# Allegro board 08_042340a.brd
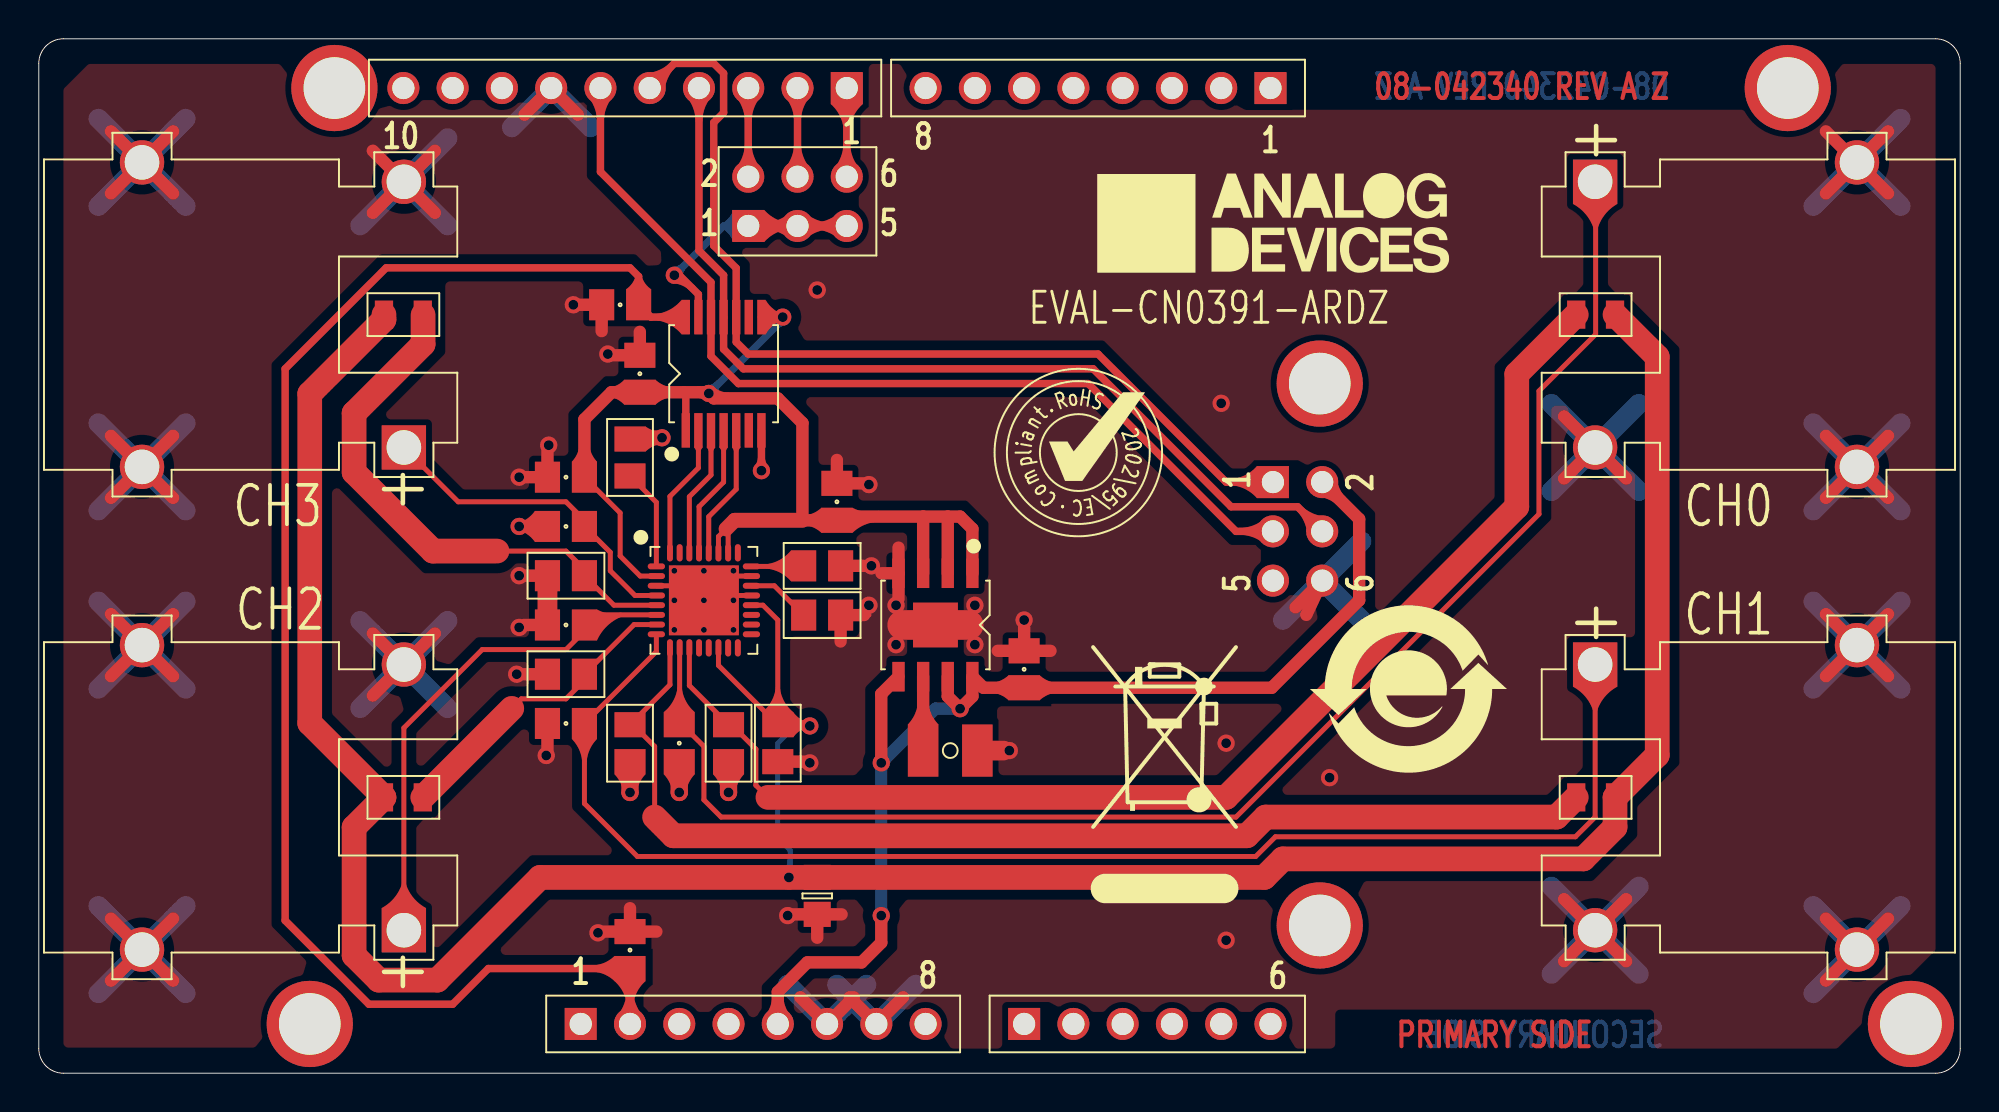
[diagram p0: board, top side]
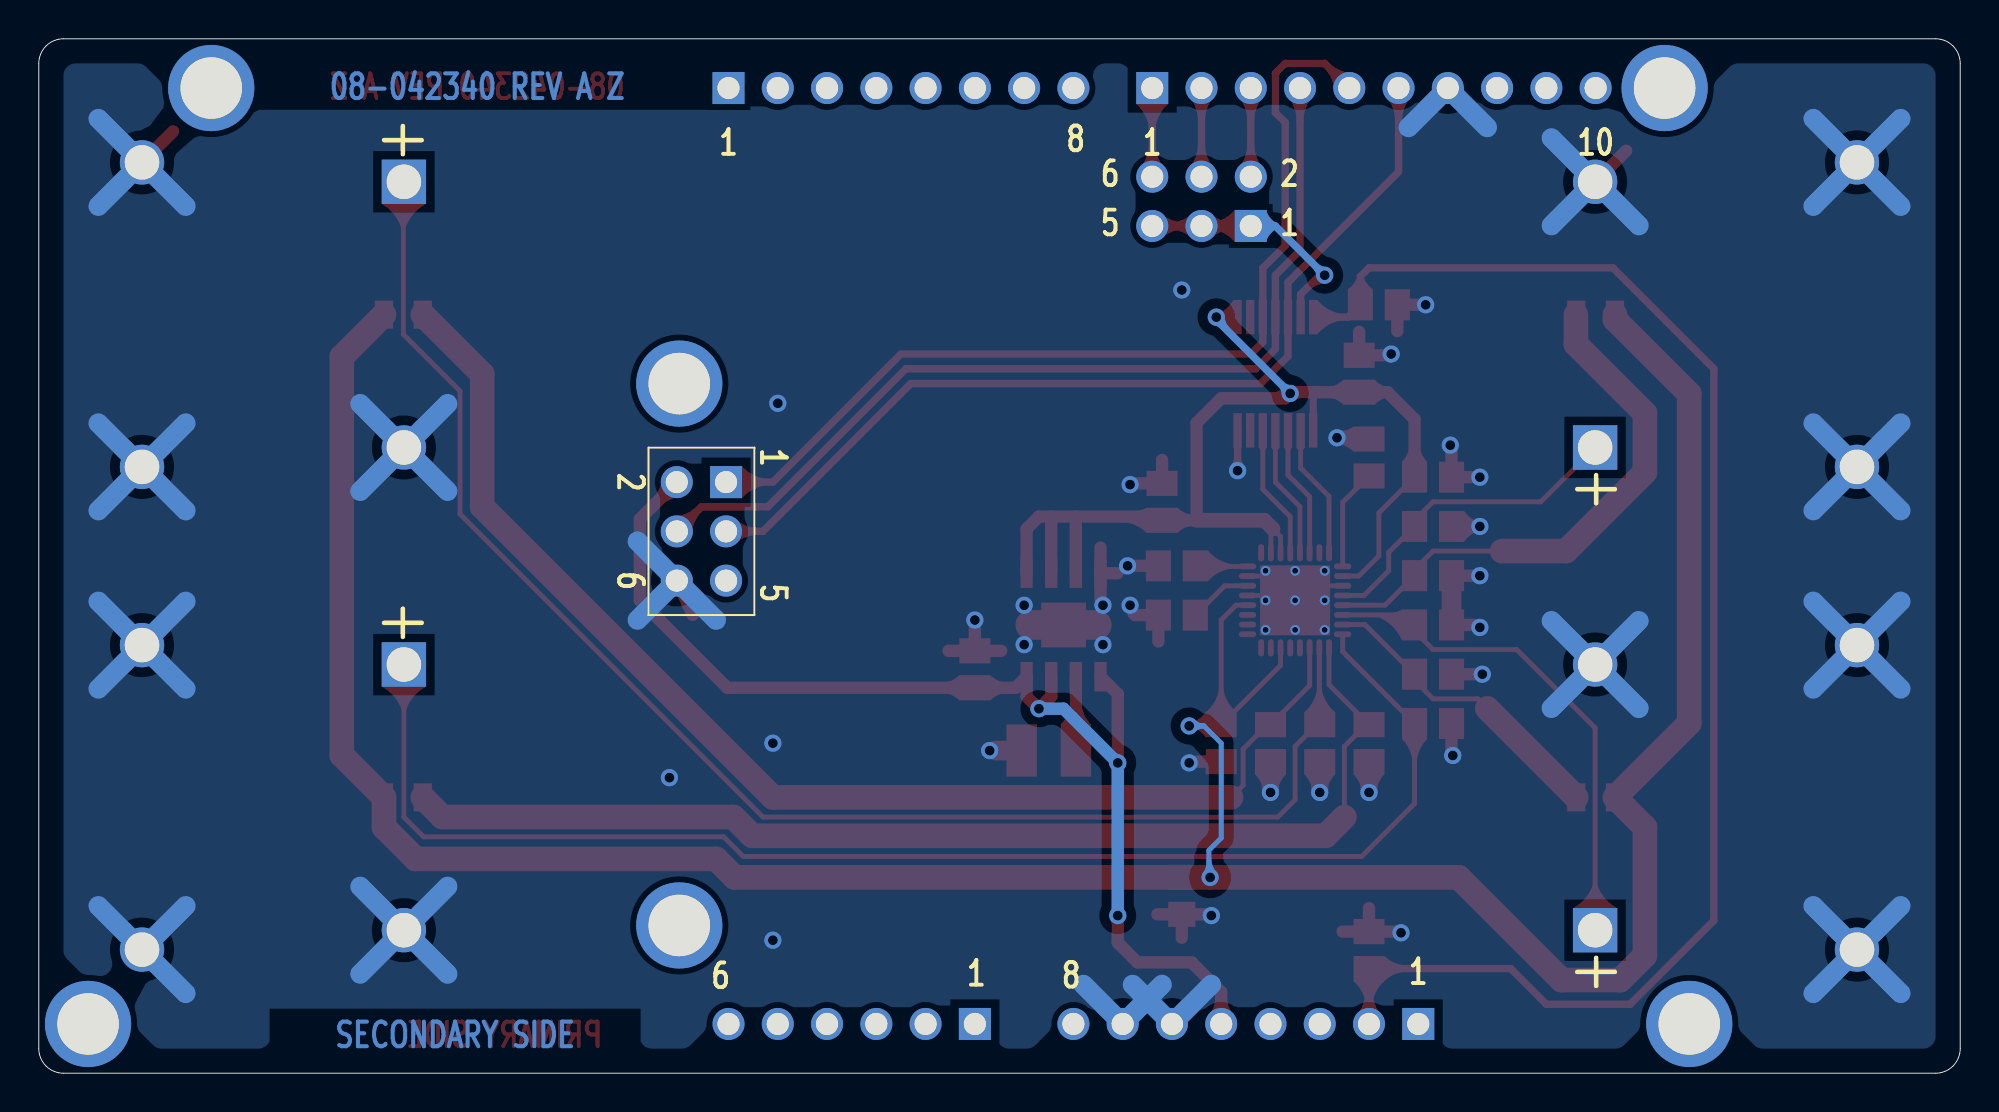
[diagram p1: board, bottom side, seen from below]

Outline 99.06 x 53.34 mm; copper layers: TOP, BOTTOM. Coordinates in mm from the lower left corner of the outline.
Outline path: 0,52.07 0,1.27 arc(0.37,0.37) 1.27,0 97.79,0 arc(98.69,0.37) 99.06,1.27 99.06,52.07 arc(98.69,52.97) 97.79,53.34 1.27,53.34 arc(0.37,52.97) 0,52.07

## Placement (name value [footprint] x y rotation side)
C1  0.47uF  [C0805]  27.18 28.19 180 top
C2  0.47uF  [C0805]  27.18 23.11 180 top
C3  0.47uF  [C0805]  27.18 18.03 180 top
C4  0.47uF  [C0805]  33.02 17.02 270 top
C5  0.1uF  [C0805H53]  27.18 25.65 180 top
C6  0.1uF  [C0805H53]  27.18 20.57 180 top
C7  0.1uF  [C0805H53]  30.48 17.02 270 top
C8  0.1uF  [C0805H53]  38.1 17.02 270 top
C9  0.1uF  [C0805H53]  35.56 17.02 270 top
C10  1UF  [C0805H60]  27.18 30.73 180 top
C11  0.1uF  [C0805H53]  40.39 23.62 180 top
C12  0.1uF  [C0805H53]  30.48 31.75 270 top
C13  0.1uF  [C0805H53]  40.39 26.16 180 top
C14  1UF  [C0805H60]  30.99 36.07 90 top
C15  3300PF  [C1210]  46.99 16.64 0 top
C16  1UF  [C0805H60]  29.97 39.62 180 top
C17  1UF  [C0805H60]  30.48 6.35 90 top
C18  1UF  [C0805H60]  50.8 20.83 90 top
C19  1UF  [C0805H60]  41.15 29.46 90 top
JP1  2213S-06G  [CNHDR2X3H485]  36.58 43.69 0 top
NOREF  -  []  0 1.27 0 top
NOREF#2  -  [unnamed#2]  90.17 50.8 0 top
NOREF#3  -  []  21.59 80.01 0 top
NOREF#4  -  []  1.27 0 0 top
NOREF#5  -  []  99.06 1.27 0 top
NOREF#6  -  [unnamed#2]  15.24 50.8 0 top
NOREF#7  -  []  53.59 32 0 top
NOREF#8  -  []  13.97 2.54 0 top
NOREF#9  -  []  -52.07 -76.2 0 top
NOREF#10  -  []  70.61 19.81 0 top
NOREF#11  -  []  67.31 25.65 0 top
NOREF#12  -  []  97.79 0 90 top
NOREF#13  -  []  21.59 304.8 0 top
NOREF#14  -  []  -5.59 -33.53 0 top
NOREF#15  -  []  1.27 53.34 0 top
NOREF#16  -  []  166.37 313.69 0 top
NOREF#17  -  []  -52.07 -76.2 0 top
NOREF#18  -  []  0 52.07 0 top
NOREF#19  -  []  -52.07 -76.2 0 top
NOREF#20  -  [unnamed#2]  96.52 2.54 0 top
NOREF#21  -  []  13.97 2.54 0 top
NOREF#22  -  [unnamed#2]  66.04 7.62 0 top
NOREF#23  -  [unnamed#2]  13.97 2.54 0 top
NOREF#24  -  [unnamed#2]  66.04 35.56 0 top
NOREF#25  -  []  98.95 52.58 0 top
NOREF#26  -  []  64.13 42.55 0 top
NOREF#27  -  []  166.38 8.25 180 bottom
P1  PCC-SMP-U-100-ROHS  [CNOMEGAPCC-SMP]  18.82 32.27 90 top
P2  PCC-SMP-U-100-ROHS  [CNOMEGAPCC-SMP]  18.82 7.37 90 top
P3  PCC-SMP-U-100-ROHS  [CNOMEGAPCC-SMP]  80.24 21.07 270 top
P4  PCC-SMP-U-100-ROHS  [CNOMEGAPCC-SMP]  80.24 45.97 270 top
P5  SSQ-108-03-G-S  [CNSAMTECSSQ-108-XX-X-S]  27.94 2.54 0 top
P6  SSQ-106-03-G-S  [CNSAMTECSSQ-106-XX-X-S]  50.8 2.54 0 top
P7  SSQ-103-03-G-D  [CNSAMTECSSQ-103-XX-X-D]  63.63 30.48 270 bottom
P8  SSQ-110-03-G-S  [CNSAMTECSSQ-110-XX-X-S]  41.66 50.8 180 top
P9  SSQ-108-03-G-S  [CNSAMTECSSQ-108-XX-X-S]  63.5 50.8 180 top
R1  1K  [R0805H20]  18.8 39.12 180 top
R2  1K  [R0805H20]  18.8 14.22 180 top
R3  1K  [R0805H20]  80.26 14.22 0 top
R4  1K  [R0805H20]  80.26 39.12 0 top
R5  1.6K  [R0805]  40.13 9.14 270 top
U1  AD7124-8BCPZ  [QFN32_5X5_PAD3_6X3_6]  34.29 24.38 270 top
U2  TXB0104PWR  [TSSOP14]  35.31 36.07 0 top
U3  ADP7118ARDZ-3.3  [SO8NB-PAD2_3X2_3]  46.23 23.11 180 top

## Library data of the parts
C1-C4 = CAP: Tolerance: 10; User Part Number: UPN; part number: CAP_SM-0.47UF,16V,10,E000463,C0805; tolerance: 10
C5-C9 C11-C13 = CAP: Tolerance: 10; User Part Number: UPN; part number: CAP_SM-0.1UF,25V,10,E012855,C0805H53; tolerance: 10
C10 C14 C16-C19 = CAP: Tolerance: 20; User Part Number: UPN; part number: CAP_SM-1UF,16V,20,E024768,C0805H60; tolerance: 20
C15 = CAP: Tolerance: 10; User Part Number: UPN; part number: CAP_SM-3300PF,200V,10,E026500,C1210; tolerance: 10
JP1 = CN6P_JMPRSHRT: User Part Number: UPN; Tolerance: N/A; alternate symbols: CNHDR2X3H485_ALT; part number: CN6P_JMPRSHRT_TH-2213S-06G,E020984,CNHDR2X3H485; tolerance: N/A
P1-P4 = CN2P_2PSHLD: User Part Number: UPN; Tolerance: N/A; part number: CN2P_2PSHLD_TH-PCC-SMP-U-100-ROHS,E025050,CNOMEGAPCC-SMP; tolerance: N/A
P5 P9 = CN8P_A: User Part Number: UPN; Tolerance: N/A; part number: CN8P_A_TH-SSQ-108-03-G-S,E020478,CNSAMTECSSQ-108-XX-X-S; tolerance: N/A
P6 = CN6P: User Part Number: UPN; Tolerance: N/A; part number: CN6P_TH-SSQ-106-03-G-S,E020477,CNSAMTECSSQ-106-XX-X-S; tolerance: N/A
P7 = CN6P: User Part Number: UPN; Tolerance: N/A; part number: CN6P_TH-SSQ-103-03-G-D,E020488,CNSAMTECSSQ-103-XX-X-D; tolerance: N/A
P8 = CN10P: User Part Number: UPN; Tolerance: N/A; part number: CN10P_TH-SSQ-110-03-G-S,E020479,CNSAMTECSSQ-110-XX-X-S; tolerance: N/A
R1-R4 = RES: Tolerance: 0.12; User Part Number: UPN; part number: RES_SM-1K,E025151,N/A,0.12,R0805H20; tolerance: 0.12
R5 = RES: Tolerance: 0.1; User Part Number: UPN; part number: RES_SM-1.6K,E003823,1/8W,0.1,R0805; tolerance: 0.1
U1 = AD7124_8: Tolerance: N/A; User Part Number: UPN; part number: AD7124_8_SM-AD7124-8BCPZ,E023649,QFN32_5X5_PAD3_6X3_6; tolerance: N/A
U2 = TXB0104: Tolerance: N/A; User Part Number: UPN; part number: TXB0104_SM-TXB0104PWR,E006113,TSSOP14; tolerance: N/A
U3 = ADP7118_V3: Tolerance: N/A; User Part Number: UPN; part number: ADP7118_V3_SM-ADP7118ARDZ-3.3,E021962,SO8NB-PAD2_3X2_3; tolerance: N/A

## Footprints (pads in the part's own frame, mm; a bottom-side part is the same pattern mirrored in y, then rotated)
C0805
  rect 1.295x1.6 smd: 1(-0.953,0) 2(0.953,0)
C0805H53
  rect 1.295x1.6 smd: 1(-0.953,0) 2(0.953,0)
C0805H60
  rect 1.295x1.6 smd: 1(-0.953,0) 2(0.953,0)
C1210
  rect 1.575x2.692 smd: 1(-1.397,0) 2(1.397,0)
CNHDR2X3H485
  rect 1.651x1.651 hole 1.143: 1(0,0)
  round 1.651 hole 1.143: 2(0,2.54) 3(2.54,0) 4(2.54,2.54) 5(5.08,0) 6(5.08,2.54)
CNOMEGAPCC-SMP
  rect 2.286x2.286 hole 1.778: 1(0,0)
  round 2.286 hole 1.778: 2(13.7,0) SH1(-1,13.5) SH2(14.7,13.5)
CNSAMTECSSQ-103-XX-X-D
  rect 1.651x1.651 hole 1.143: 1(0,0)
  round 1.651 hole 1.143: 2(0,-2.54) 3(2.54,0) 4(2.54,-2.54) 5(5.08,0) 6(5.08,-2.54)
CNSAMTECSSQ-106-XX-X-S
  rect 1.651x1.651 hole 1.143: 1(0,0)
  round 1.651 hole 1.143: 2(2.54,0) 3(5.08,0) 4(7.62,0) 5(10.16,0) 6(12.7,0)
CNSAMTECSSQ-108-XX-X-S
  rect 1.651x1.651 hole 1.143: 1(0,0)
  round 1.651 hole 1.143: 2(2.54,0) 3(5.08,0) 4(7.62,0) 5(10.16,0) 6(12.7,0) 7(15.24,0) 8(17.78,0)
CNSAMTECSSQ-110-XX-X-S
  rect 1.651x1.651 hole 1.143: 1(0,0)
  round 1.651 hole 1.143: 2(2.54,0) 3(5.08,0) 4(7.62,0) 5(10.16,0) 6(12.7,0) 7(15.24,0) 8(17.78,0) 9(20.32,0) 10(22.86,0)
QFN32_5X5_PAD3_6X3_6
  oval 0.305x0.889 smd: 1(-1.75,-2.451) 2(-1.25,-2.451) 3(-0.75,-2.451) 4(-0.25,-2.451) 5(0.25,-2.451) 6(0.75,-2.451) 7(1.25,-2.451) 8(1.75,-2.451) 17(1.75,2.451) 18(1.25,2.451) 19(0.75,2.451) 20(0.25,2.451) 21(-0.25,2.451) 22(-0.75,2.451) 23(-1.25,2.451) 24(-1.75,2.451)
  oval 0.889x0.305 smd: 9(2.451,-1.75) 10(2.451,-1.25) 11(2.451,-0.75) 12(2.451,-0.25) 13(2.451,0.25) 14(2.451,0.75) 15(2.451,1.25) 16(2.451,1.75) 25(-2.451,1.75) 26(-2.451,1.25) 27(-2.451,0.75) 28(-2.451,0.25) 29(-2.451,-0.25) 30(-2.451,-0.75) 31(-2.451,-1.25) 32(-2.451,-1.75)
  rect 3.607x3.607 smd: PAD(0,0)
R0805
  rect 1.295x1.397 smd: 1(-0.953,0) 2(0.953,0)
R0805H20
  rect 0.94x1.448 smd: 1(-1,0) 2(1,0)
SO8NB-PAD2_3X2_3
  rect 0.635x1.524 smd: 1(-1.905,-2.667) 2(-0.635,-2.667) 3(0.635,-2.667) 4(1.905,-2.667) 5(1.905,2.667) 6(0.635,2.667) 7(-0.635,2.667) 8(-1.905,2.667)
  rect 2.311x2.311 smd: PAD(0,0)
TSSOP14
  rect 0.432x1.778 smd: 1(-1.95,-2.92) 2(-1.3,-2.92) 3(-0.65,-2.92) 4(0,-2.92) 5(0.65,-2.92) 6(1.3,-2.92) 7(1.95,-2.92) 8(1.95,2.92) 9(1.3,2.92) 10(0.65,2.92) 11(0,2.92) 12(-0.65,2.92) 13(-1.3,2.92) 14(-1.95,2.92)
unnamed#2
  round 4.445 hole 3.175 unplated: (0,0)

## Nets
3.3V: C10.1(N1) C14.1(N1) C19.1(N1) U1.2(IOVDD) U1.26(AVDD) U1.27(SYNC_N) U2.1(VCCA) U2.8(OE) U3.1(VOUT1) U3.2(VOUT2) U3.3(SENSE/ADJ)
5V: C18.1(N1) P5.5(N5) P7.2(N2) U3.5(EN) U3.7(VIN1) U3.8(VIN2)
GND: C1.2(N2) C2.2(N2) C3.2(N2) C4.2(N2) C5.2(N2) C6.2(N2) C7.2(N2) C8.2(N2) C9.2(N2) C10.2(N2) C11.1(N1) C12.1(N1) C13.1(N1) C14.2(N2) C15.2(N2) C16.2(N2) C17.2(N2) C18.2(N2) C19.2(N2) P1.2(N2) P1.SH1 P1.SH2 P2.2(N2) P2.SH1 P2.SH2 P3.2(N2) P3.SH1 P3.SH2 P4.2(N2) P4.SH1 P4.SH2 P5.6(N6) P5.7(N7) P7.6(N6) P8.7(N7) R5.2(N2) U1.3(DGND) U1.21(AIN15/IOUT/VBIAS/REFIN2(-)) U1.23(AVSS) U1.PAD U2.7(GND) U3.4(GND) U3.PAD
IOREF: C16.1(N1) C17.1(N1) P5.2(N2) U2.14(VCCB)
MISO_A: U1.28(DOUT/RDY_N) U2.5(A4)
MISO_B: P7.1(N1) P8.5(N5) U2.10(B4)
MOSI_A: U1.29(DIN) U2.4(A3)
MOSI_B: P7.4(N4) P8.4(N4) U2.11(B3)
SCK_A: U1.30(SCLK) U2.3(A2)
SCK_B: P7.3(N3) P8.6(N6) U2.12(B2)
SS_A: U1.32(CS_N) U2.2(A1)
SS_B: JP1.1(S1) JP1.3(S3) JP1.5(S5) U2.13(B1)
UNNAMED_2_AD71248_I89_AIN1: C5.1(N1) R1.1(N1) U1.5(AIN1/IOUT/VBIAS)
UNNAMED_2_AD71248_I89_AIN2: C2.1(N1) P2.1(N1) U1.6(AIN2/IOUT/VBIAS/P1)
UNNAMED_2_AD71248_I89_AIN3: C6.1(N1) R2.1(N1) U1.7(AIN3/IOUT/VBIAS/P2)
UNNAMED_2_AD71248_I89_AIN4: C3.1(N1) P3.1(N1) U1.8(AIN4/IOUT/VBIAS/P3)
UNNAMED_2_AD71248_I89_AIN5: C7.1(N1) R3.1(N1) U1.9(AIN5/IOUT/VBIAS/P4)
UNNAMED_2_AD71248_I89_AIN6: C4.1(N1) P4.1(N1) U1.10(AIN6/IOUT/VBIAS)
UNNAMED_2_AD71248_I89_AIN7: C9.1(N1) R4.1(N1) U1.11(AIN7/IOUT/VBIAS)
UNNAMED_2_AD71248_I89_AIN14: C8.1(N1) R1.2(N2) R2.2(N2) R3.2(N2) R4.2(N2) R5.1(N1) U1.14(AIN8/IOUT/VBIAS) U1.20(AIN14/IOUT/VBIAS/REFIN2(+))
UNNAMED_2_AD71248_I89_REFOUT: C11.2(N2) U1.22(REFOUT)
UNNAMED_2_AD71248_I89_REGCAPA: C13.2(N2) U1.24(REGCAPA)
UNNAMED_2_AD71248_I89_REGCAPD: C12.2(N2) U1.1(REGCAPD)
UNNAMED_2_ADP7118V3_I171_SS: C15.1(N1) U3.6(SS)
UNNAMED_2_CAP_I152_N1: C1.1(N1) P1.1(N1) U1.4(AIN0/IOUT/VBIAS)
UNNAMED_2_CN10P_I29_N1: JP1.6(S6) P8.1(N1)
UNNAMED_2_CN10P_I29_N2: JP1.4(S4) P8.2(N2)
UNNAMED_2_CN10P_I29_N3: JP1.2(S2) P8.3(N3)

Pads without a net: P5 1 3 4 8; P6 1 2 3 4 5 6; P7 5; P8 8 9 10; P9 1 2 3 4 5 6 7 8; U1 12 13 15 16 17 18 19 25 31; U2 6 9

## Via types
v1: diameter 0.889, hole 0.508, TOP to BOTTOM, 39 vias
v2: diameter 0.508, hole 0.305, TOP to BOTTOM, 9 vias

## Routing (per net, layer and track width the routed paths; a pad name or vN(x,y) marks a point on that pad's centre or on a via; arc(x,y) is an arc through that point)
3.3V: length 60.2
  TOP w0.254: C10.1 29.97,28.89 29.97,26.67 31.01,25.63 U1.2 ; U1.26 35.54,27.96 35.43,28.07 35.04,27.67 U1.27
  TOP w0.381: U2.8 v1(38.35,38.99) ; 33.27,35.12 33.36,35.03 U2.1
  TOP w0.635: 45.59,28.7 41.34,28.7 C19.1 39.37,28.51 39.37,33.53 38.1,34.8 34.8,34.8 v1(34.54,35.05) 34.48,35.12 C14.1 29.53,35.12 28.13,33.72 C10.1 ; 45.59,28.7 U3.3 ; 45.59,28.7 46.86,28.7 ; 46.86,28.7 47.5,28.7 48.13,28.07 U3.1 ; 46.86,28.7 U3.2
  TOP w0.762: 39.37,28.51 35.88,28.51 35.43,28.07
  BOTTOM w0.381: v1(34.54,35.05) 38.35,38.86 v1(38.35,38.99)
5V: length 60.1
  TOP w0.635: v1(43.43,8.13) 43.43,6.73 42.42,5.71 39.62,5.71 38.1,4.19 P5.5 ; 44.32,20.45 43.43,19.56 v1(43.43,16) ; P7.2 68.07,28.57 68.07,24.38 63.56,19.88 C18.1 48.7,19.88 48.13,20.45 48.13,19.43 v1(47.5,18.8) 46.86,19.43 U3.7
  BOTTOM w0.635: v1(43.43,8.13) v1(43.43,16) 46.23,18.8 v1(47.5,18.8)
GND: length 349.8
  TOP w0.254: 29.63,37.02 29.4,37.02 v1(29.34,37.08) ; U1.23 35.54,25.63 34.54,24.63 ; v1(42.8,30.35) 42.74,30.42 42.51,30.42 ; 34.54,24.63 v2(34.29,24.38) 33.54,25.13 U1.3 ; 34.54,24.63 U1.21 ; 29.12,7.3 28.89,7.3 v1(28.83,7.24) ; 38.87,8.19 38.67,8.19 v1(38.61,8.13) ; 42.55,23.62 42.8,23.62 ; 42.55,26.16 v1(42.93,26.16) ; 50.8,22.99 v1(50.8,23.37) ; 27.81,39.62 v1(27.56,39.62)
  TOP w0.381: U2.7 v1(37.26,31.07)
  TOP w0.508: v1(24.77,28.19) C1.2
  TOP w0.635: 3.72,20.47 P2.SH2 ; P2.SH2 3.72,23.68 ; P2.SH2 6.92,20.47 ; P2.SH2 6.92,23.68 ; 3.72,45.36 P1.SH2 ; P1.SH2 3.72,48.57 ; P1.SH2 6.92,48.57 ; P1.SH2 6.92,45.36 ; P1.2 20.42,47.57 ; P1.2 20.42,44.36 ; P1.2 17.22,44.36 ; P1.2 17.22,47.57 ; 44.32,25.78 44.32,27.1 ; 44.32,25.78 43.45,25.78 ; 44.32,25.78 44.32,24.46 ; 27.79,49.42 P8.7 25.04,49.42 ; 26.23,32.09 C10.2 25.02,30.73 ; P4.SH1 95.34,48.57 ; P4.SH1 92.14,45.36 ; P4.SH1 95.34,45.36 ; P4.SH1 92.14,48.57 ; 38.87,8.19 R5.2 ; R5.2 41.39,8.19 ; R5.2 40.13,6.98 ; 64.79,24.02 P7.6 65.35,23.63 ; P3.SH2 95.34,7.98 ; P3.SH2 92.14,7.98 ; P3.SH2 92.14,4.77 ; 29.63,37.02 C14.2 30.99,38.23 ; C18.2 52.16,21.78 ; C18.2 50.8,22.99 ; C18.2 49.44,21.78 ; P1.SH1 6.92,29.66 ; P1.SH1 3.72,32.87 ; P1.SH1 6.92,32.87 ; P1.SH1 3.72,29.66 ; 3.72,4.77 P2.SH1 ; P2.SH1 6.92,7.98 ; P2.SH1 3.72,7.98 ; P2.SH1 6.92,4.77 ; P2.2 20.42,22.68 ; P2.2 17.22,19.47 ; P2.2 17.22,22.68 ; P3.SH1 95.34,20.47 ; P3.SH1 92.14,23.68 ; P3.SH1 92.14,20.47 ; P3.SH1 95.34,23.68 ; 78.64,33.87 P4.2 ; P4.2 78.64,30.66 ; P4.2 81.84,30.66 ; 92.14,32.87 P4.SH2 ; P4.SH2 92.14,29.66 ; P4.SH2 95.34,32.87 ; P4.SH2 95.34,29.66 ; 26.23,16.67 C3.2 ; 42.51,30.42 C19.2 41.15,31.62 ; P3.2 81.84,8.98 ; P3.2 81.84,5.77 ; P3.2 78.64,8.98 ; P3.2 78.64,5.77 ; 41.34,22.26 C11.1 42.55,23.62 ; 42.02,3.92 P5.6 39.26,3.92 ; 25.02,25.65 C5.2 ; 25.02,20.57 C6.2 ; C13.1 42.55,26.16 ; 29.12,7.3 C17.2 ; C17.2 30.48,8.51 ; C17.2 31.84,7.3 ; C8.2 39.46,16.07 ; 25.02,23.11 C2.2 ; 29.02,38.26 C16.2 27.81,39.62 ; 44.56,3.92 P5.7 41.8,3.92
  TOP w0.762: v1(32.13,32.77) 30.54,32.77 C12.1
  TOP w0.889: v1(35.56,14.48) C9.2 ; C4.2 v1(33.02,14.48) ; C7.2 v1(30.48,14.48)
  TOP w1.016: C15.2 49.73,16.64 ; C5.2 C2.2
  TOP w1.524: 47.94,23.11 U3.PAD 44.51,23.11
  BOTTOM w1.016: 45.21,4.57 P5.7 41.15,4.57 ; 3.07,49.22 P1.SH2 ; P1.SH2 7.57,44.71 ; P1.SH2 3.07,44.71 ; P1.SH2 7.57,49.22 ; 28.44,48.77 P8.7 24.39,48.77 ; 91.49,44.71 P4.SH1 ; P4.SH1 95.99,49.22 ; P4.SH1 95.99,44.71 ; 3.07,24.33 P2.SH2 ; P2.SH2 3.07,19.82 ; P2.SH2 7.57,19.82 ; P2.SH2 7.57,24.33 ; P4.SH2 95.99,33.52 ; P4.SH2 91.49,29.01 ; P4.SH2 91.49,33.52 ; P4.SH2 95.99,29.01 ; 3.07,4.12 P2.SH1 ; P2.SH1 7.57,8.63 ; P2.SH1 7.57,4.12 ; P2.SH1 3.07,8.63 ; P3.SH1 95.99,19.82 ; P3.SH1 91.49,19.82 ; P3.SH1 91.49,24.33 ; P3.SH1 95.99,24.33 ; P3.SH2 95.99,8.63 ; P3.SH2 91.49,8.63 ; P3.SH2 91.49,4.12 ; P1.2 21.07,48.22 ; P1.2 16.57,43.71 ; P1.2 21.07,43.71 ; 77.99,9.63 P3.2 ; P3.2 82.49,5.12 ; P3.2 82.49,9.63 ; P3.2 77.99,5.12 ; 3.07,33.52 P1.SH1 ; P1.SH1 7.57,29.01 ; P1.SH1 7.57,33.52 ; P1.SH1 3.07,29.01 ; 77.99,34.52 P4.2 ; P4.2 82.49,30.01 ; P4.2 77.99,30.01 ; P4.2 82.49,34.52 ; 38.61,4.57 P5.6 42.67,4.57 ; P7.6 68.19,27.43 ; P7.6 68.19,23.37 ; P7.6 64.14,23.37 ; P2.2 21.07,18.82 ; P2.2 21.07,23.33 ; P2.2 16.57,23.33 ; P2.2 16.57,18.82
  vias: v1(24.64,20.57) v1(24.77,30.73) v1(24.77,25.65) v1(24.77,22.99) v1(26.16,16.38) v1(26.29,32.38) v1(39.75,16) v1(40.13,40.39) v1(42.8,24.13) v1(44.2,24.13) v1(44.2,22.1) v1(48.26,24.13) v1(48.26,22.1) v1(50.04,16.64) v1(60.96,34.54) v1(61.21,17.02) v1(61.21,6.86) v1(66.55,15.24) v2(32.77,25.91) v2(32.77,24.38) v2(32.77,22.86) v2(34.29,25.91) v2(34.29,22.86) v2(35.81,25.91) v2(35.81,24.38) v2(35.81,22.86)
IOREF: length 76.4
  TOP w0.381: U2.14 31.56,38.99 C16.1 30.92,41.08 30.48,41.53 17.91,41.53 12.7,36.32 12.7,7.87 17.02,3.56 21.34,3.56 23.18,5.4 C17.1 P5.2
MISO_A: length 6.9
  TOP w0.254: U2.5 35.96,30.11 34.54,28.7 U1.28
MISO_B: length 49.8
  TOP w0.381: P8.5 32.77,52.07 34.8,52.07 35.31,51.56 35.31,49.53 34.8,49.02 34.8,42.67 35.96,41.51 U2.10 35.96,37.7 36.58,37.08 54.61,37.08 61.21,30.48 P7.1
MOSI_A: length 6.8
  TOP w0.254: U1.29 34.04,29.21 35.31,30.48 U2.4
MOSI_B: length 48.7
  TOP w0.381: P8.4 34.04,42.42 35.31,41.15 U2.11 35.31,37.34 36.32,36.32 54.36,36.32 61.47,29.21 64.9,29.21 P7.4
SCK_A: length 6.8
  TOP w0.254: U2.3 34.66,30.85 33.54,29.73 U1.30
SCK_B: length 48.9
  TOP w0.381: P7.3 61.72,27.94 54.1,35.56 36.07,35.56 34.66,36.97 U2.12 34.66,40.78 28.96,46.48 P8.6
SS_A: length 6.9
  TOP w0.254: U1.32 32.54,29.75 34.01,31.21 U2.2
SS_B: length 12.8
  TOP w0.381: U2.13 34.01,40.16 33.02,41.15 v1(32.77,41.15) ; JP1.1 JP1.3 JP1.5
  BOTTOM w0.381: v1(32.77,41.15) 35.31,43.69 JP1.1
UNNAMED_2_AD71248_I89_AIN1: length 28.2
  TOP w0.254: 23.62,26.92 27.18,26.92 28.13,25.97 C5.1 29.65,24.13 U1.5 ; R1.1 19.81,39.1
  TOP w1.27: 23.62,26.92 20.32,26.92 16.26,30.99 16.26,34.04 19.81,37.59 19.81,39.1
UNNAMED_2_AD71248_I89_AIN2: length 26
  TOP w0.254: P2.1 18.82,17.81 22.86,21.84 27.18,21.84 28.13,22.8 C2.1 28.65,23.63 U1.6
UNNAMED_2_AD71248_I89_AIN3: length 15.9
  TOP w0.254: U1.7 30.69,23.13 C6.1 28.13,20.26 27.18,19.3 24.88,19.3 24.38,18.81
  TOP w1.27: 24.38,18.81 R2.1
UNNAMED_2_AD71248_I89_AIN4: length 72.2
  TOP w0.254: U1.8 31.84,21.74 C3.1 28.13,13.91 30.86,11.18 62.74,11.18 63.75,12.19 79.22,12.19 80.24,13.21 P3.1
UNNAMED_2_AD71248_I89_AIN5: length 58.9
  TOP w0.254: 31.75,13.21 31.75,16.85 30.63,17.97 C7.1 32.54,20.03 U1.9
  TOP w1.27: 31.75,13.21 32.72,12.24 62.28,12.24 63.25,13.21 78.25,13.21 R3.1
UNNAMED_2_AD71248_I89_AIN6: length 76.7
  TOP w0.254: P4.1 80.26,45.94 80.26,38.1 77.34,35.18 77.34,28.83 61.72,13.21 35.18,13.21 34.29,14.1 34.29,16.85 33.17,17.97 C4.1 33.04,17.99 U1.10
UNNAMED_2_AD71248_I89_AIN7: length 65.5
  TOP w0.254: U1.11 33.54,19.99 C9.1 35.71,17.97 36.97,16.71 36.97,14.85 37.59,14.22
  TOP w1.27: R4.1 76.2,36.05 76.2,29.21 61.21,14.22 37.59,14.22
UNNAMED_2_AD71248_I89_AIN14: length 157.1
  TOP w0.254: C8.1 38.1,23.37 37.33,24.13 U1.20 ; C8.1 35.04,21.03 U1.14 ; C8.1 39.69,17.97 v1(39.75,17.91)
  TOP w1.27: R1.2 17.8,38.86 13.97,35.04 13.97,18.05 R2.2 16.26,12.68 16.26,6.07 17.53,4.8 20.55,4.8 25.84,10.1 v1(38.67,10.1) R5.1 63.18,10.1 64.14,11.05 79.63,11.05 81.26,12.68 R3.2 83.44,16.4 83.44,36.94 R4.2
  BOTTOM w0.254: v1(39.75,17.91) 38.99,17.91 38.1,17.02 38.1,12.13 38.73,11.49 38.73,10.16 v1(38.67,10.1)
UNNAMED_2_AD71248_I89_REFOUT: length 3.3
  TOP w0.254: U1.22 37.92,25.13 C11.2
UNNAMED_2_AD71248_I89_REGCAPA: length 2.7
  TOP w0.254: U1.24 39.41,26.13 C13.2
UNNAMED_2_AD71248_I89_REGCAPD: length 5.2
  TOP w0.254: C12.2 31.84,29.44 U1.1
UNNAMED_2_ADP7118V3_I171_SS: length 3.8
  TOP w0.635: U3.6 45.59,16.64
UNNAMED_2_CAP_I152_N1: length 16.9
  TOP w0.254: P1.1 21.62,29.46 27.18,29.46 28.13,28.51 C1.1 29.46,26.86 29.46,25.91 30.74,24.63 U1.4
UNNAMED_2_CN10P_I29_N1: length 4.6
  TOP w0.381: P8.1 JP1.6
UNNAMED_2_CN10P_I29_N2: length 4.6
  TOP w0.381: P8.2 JP1.4
UNNAMED_2_CN10P_I29_N3: length 4.6
  TOP w0.381: P8.3 JP1.2

## Copper pours and planes (outline as drawn; the poured copper is in the pictures)
GND on TOP: 1.27,1.32 1.27,50.75 2.57,52.04 97.79,52.04 97.79,6.35 92.71,1.27 26.35,1.27 26.35,4.19 26.17,4.64 25.72,4.83 23.68,4.83 23.44,4.78 23.24,4.65 21.74,3.15 21.55,3.03 21.33,2.98 17.33,2.98 16.96,2.64 16.95,2.38 16.93,2.19 16.91,2.01 16.88,1.87 16.95,1.59 17.18,1.32 ; 16 cut-outs
GND on BOTTOM: 1.27,1.27 94.79,1.27 97.79,4.27 97.79,52.07 1.27,52.07
3.3V on TOP (solid shape): 37.47,39.88 37.88,39.4 38.43,39.12 38.48,38.99 38.43,38.86 37.88,38.57 37.47,38.1 37.21,38.99
3.3V on TOP (solid shape): 31.07,35.12 30.19,34.47 29.79,34.76 29.32,34.89 29.22,35.12 29.32,35.34 29.79,35.47 30.19,35.76
3.3V on TOP (solid shape): 28.13,32.65 28.38,32.53 28.48,31.99 28.78,31.53 28.13,30.65 27.48,31.53 27.78,31.99 27.88,32.53
3.3V on TOP (solid shape): 31.79,35.76 32.25,35.47 32.79,35.36 32.9,35.12 32.79,34.87 32.25,34.76 31.79,34.47 30.91,35.12
3.3V on TOP (solid shape): 41.23,28.51 40.35,27.86 39.89,28.16 39.35,28.27 39.23,28.51 39.35,28.76 39.89,28.86 40.35,29.16
3.3V on TOP (solid shape): 41.95,29.16 42.62,28.95 43.31,29 43.52,28.74 43.38,28.44 42.61,28.29 41.95,27.86 41.07,28.5
5V on TOP (solid shape): 50.88,19.88 50,19.23 49.54,19.52 49,19.63 48.89,19.88 49,20.12 49.54,20.23 50,20.52
5V on TOP (solid shape): 51.6,20.52 52.06,20.23 52.6,20.12 52.71,19.88 52.6,19.63 52.06,19.52 51.6,19.23 50.72,19.88
5V on TOP (solid shape): 38.1,4.18 38.39,3.99 38.51,3.38 38.86,2.86 38.1,2.46 37.34,2.86 37.69,3.38 37.81,3.99
5V on TOP (solid shape): 66.93,30.8 67.05,30.18 67.4,29.66 67.33,29.32 66.98,29.25 66.46,29.6 65.85,29.72 66.11,30.54
GND on TOP (solid shape): 26.29,28.19 25.58,27.39 25.17,27.8 24.64,28.02 24.57,28.19 24.64,28.37 25.17,28.59 25.58,28.99
GND on TOP (solid shape): 31.28,33.35 31.77,33.12 32.3,33.07 32.46,32.78 32.33,32.48 31.76,32.37 31.28,32.05 30.38,32.7
GND on TOP (solid shape): 31.28,15.42 30.93,14.88 30.81,14.26 30.48,14.12 30.15,14.26 30.03,14.88 29.68,15.42 30.48,16.18
GND on TOP (solid shape): 33.82,15.42 33.47,14.88 33.35,14.26 33.02,14.12 32.69,14.26 32.57,14.88 32.22,15.42 33.02,16.18
GND on TOP (solid shape): 36.36,15.42 36.01,14.88 35.89,14.26 35.56,14.12 35.23,14.26 35.11,14.88 34.76,15.42 35.56,16.18
IOREF on TOP (solid shape): 30.92,41.24 31.06,41.19 31.24,40.76 31.57,40.42 30.92,39.58 30.28,40.42 30.61,40.76 30.79,41.19
IOREF on TOP (solid shape): 30.53,5.4 29.68,4.75 29.13,5.11 28.48,5.23 28.39,5.4 28.48,5.56 29.13,5.68 29.68,6.05
IOREF on TOP (solid shape): 33.4,38.99 33.14,38.1 32.53,38.6 31.78,38.83 31.7,38.99 31.78,39.14 32.53,39.38 33.14,39.88
IOREF on TOP (solid shape): 31.28,4.75 30.83,4.16 30.64,3.45 30.48,3.36 30.32,3.45 30.13,4.16 29.68,4.75 30.48,5.45
IOREF on TOP (solid shape): 30.48,4.39 30.66,4.27 30.81,3.51 31.24,2.86 30.48,2.49 29.72,2.86 30.15,3.51 30.3,4.27
MISO_B on TOP (solid shape): 63.67,30.48 62.8,29.65 62.19,30.12 61.45,30.32 61.37,30.48 61.45,30.64 62.19,30.84 62.8,31.31
MISO_B on TOP (solid shape): 32.8,52.11 32.85,51.9 32.41,51.25 32.26,50.48 31.46,50.77 31.18,51.56 31.95,51.71 32.6,52.15
MOSI_B on TOP (solid shape): 34.8,50.48 34.36,49.83 34.21,49.07 34.04,48.95 33.86,49.07 33.71,49.83 33.27,50.48 34.04,50.85
MOSI_B on TOP (solid shape): 64.86,29.25 65.07,29.29 65.72,28.85 66.48,28.7 66.2,27.91 65.4,27.62 65.25,28.39 64.82,29.04
SCK_B on TOP (solid shape): 29.72,50.48 29.28,49.83 29.13,49.07 28.96,48.95 28.78,49.07 28.63,49.83 28.19,50.48 28.96,50.85
SCK_B on TOP (solid shape): 63.67,27.94 63.31,27.18 62.66,27.61 61.89,27.76 61.78,27.94 61.89,28.12 62.66,28.27 63.31,28.7
SS_B on TOP (solid shape): 33.14,41.37 33.4,40.93 33.81,40.63 33.82,40.39 33.6,40.32 33.14,40.63 32.6,40.74 32.73,41.18
SS_B on TOP (solid shape): 37.4,44.51 38.01,44.05 38.75,43.85 38.84,43.69 38.75,43.53 38.01,43.33 37.4,42.86 36.53,43.69
SS_B on TOP (solid shape): 39.16,43.69 38.8,42.93 38.15,43.36 37.38,43.51 37.27,43.69 37.38,43.86 38.15,44.02 38.8,44.45
SS_B on TOP (solid shape): 39.43,44.45 40.08,44.02 40.85,43.86 40.97,43.69 40.85,43.51 40.08,43.36 39.43,42.93 39.07,43.69
SS_B on TOP (solid shape): 41.7,43.69 41.34,42.93 40.69,43.36 39.92,43.51 39.81,43.69 39.92,43.86 40.69,44.02 41.34,44.45
SS_B on BOTTOM (solid shape): 36.62,43.69 35.75,42.97 35.51,43.34 35.14,43.59 35.12,43.69 35.14,43.79 35.51,44.04 35.75,44.4
UNNAMED_2_AD71248_I89_AIN2 on TOP (solid shape): 18.82,9.83 18.91,9.79 19.31,9.05 19.96,8.52 18.82,7.34 17.68,8.52 18.33,9.05 18.73,9.79
UNNAMED_2_AD71248_I89_AIN2 on TOP (solid shape): 28.78,23.91 29.37,23.71 30,23.76 30.09,23.67 30.07,23.55 29.3,23.06 28.78,22.31 28.1,23.11
UNNAMED_2_AD71248_I89_AIN4 on TOP (solid shape): 81.38,19.93 80.73,19.4 80.33,18.65 80.24,18.61 80.15,18.65 79.75,19.4 79.1,19.93 80.24,21.11
UNNAMED_2_AD71248_I89_AIN4 on TOP (solid shape): 28.78,17.23 28.38,16.63 28.24,15.92 28.13,15.85 28.02,15.92 27.88,16.63 27.48,17.23 28.13,18.07
UNNAMED_2_AD71248_I89_AIN6 on TOP (solid shape): 33.04,19.98 33.15,19.92 33.35,19.2 33.82,18.62 33.02,17.94 32.22,18.62 32.71,19.2 32.93,19.93
UNNAMED_2_AD71248_I89_AIN6 on TOP (solid shape): 81.38,44.82 80.74,44.27 80.36,43.52 80.27,43.48 80.17,43.52 79.76,44.28 79.1,44.82 80.24,46
UNNAMED_2_AD71248_I89_AIN14 on TOP (solid shape): 38.9,18.62 39.28,18.26 39.76,18.07 39.81,17.97 39.76,17.87 39.28,17.68 38.9,17.32 38.07,17.97
UNNAMED_2_AD71248_I89_AIN14 on TOP (solid shape): 38.1,19.95 38.21,19.89 38.43,19.19 38.9,18.62 38.1,17.94 37.3,18.62 37.77,19.19 37.99,19.89
UNNAMED_2_AD71248_I89_REGCAPA on TOP (solid shape): 39.47,26.16 38.79,25.36 38.19,25.83 37.47,26.03 37.41,26.13 37.46,26.24 38.2,26.47 38.79,26.96
UNNAMED_2_ADP7118V3_I171_SS on TOP (solid shape): 45.59,19.43 45.85,19.3 45.99,18.59 46.38,17.98 45.59,16.56 44.81,17.98 45.2,18.59 45.33,19.3
UNNAMED_2_CN10P_I29_N1 on TOP (solid shape): 42.48,49.97 42.01,49.37 41.81,48.62 41.66,48.54 41.5,48.62 41.3,49.37 40.83,49.97 41.66,50.85
UNNAMED_2_CN10P_I29_N1 on TOP (solid shape): 41.66,48.08 41.83,47.96 41.98,47.19 42.42,46.54 41.66,46.18 40.89,46.54 41.33,47.19 41.48,47.96
UNNAMED_2_CN10P_I29_N2 on TOP (solid shape): 39.12,48.08 39.29,47.96 39.44,47.19 39.88,46.54 39.12,46.18 38.35,46.54 38.79,47.19 38.94,47.96
UNNAMED_2_CN10P_I29_N2 on TOP (solid shape): 39.88,50.48 39.44,49.83 39.29,49.07 39.12,48.95 38.94,49.07 38.79,49.83 38.35,50.48 39.12,50.85
UNNAMED_2_CN10P_I29_N3 on TOP (solid shape): 36.58,48.08 36.75,47.96 36.9,47.19 37.34,46.54 36.58,46.18 35.81,46.54 36.25,47.19 36.4,47.96
UNNAMED_2_CN10P_I29_N3 on TOP (solid shape): 37.34,50.48 36.9,49.83 36.75,49.07 36.58,48.95 36.4,49.07 36.25,49.83 35.81,50.48 36.58,50.85

Small or netless copper shapes (teardrops, artwork), in the pictures only: 13 on TOP, 9 on BOTTOM

## Text on the board
BOTTOM: 08-042340 REV A Z | SECONDARY SIDE
Board Geometry/Soldermask Bottom: SOLDERMASK SECONDARY | 08-      -06
Ref Des/Silkscreen Bottom: SILKSCREEN SECONDARY | 08-      -05
TOP: PRIMARY SIDE | 08-042340 REV A Z
Board Geometry/Soldermask Top: SOLDERMASK PRIMARY | 08-      -04
Ref Des/Silkscreen Top: EVAL-CN0391-ARDZ | CH3 | CH2 | CH0 | CH1 | SILKSCREEN PRIMARY | 08-      -03
DIMENSION: " " | REF | x4 | DIA MAX
PAGE_OUTLINE: 11AUG16 | CUSTOMER EVAL BOARD Z
User.9: PASTEMASK PRIMARY | 08-      -07
User.45: FIGURE | SIZE | 12.0 | 20.0 | 45.0 | 70.0 | 125.0 | PLATED | NON-PLATED | FINISHED HOLES IN MILS | ALL UNITS ARE IN MILS | QTY | 9 | 39 | 44 | 16 | 6 | TOLERANCE/NOTES
